# Altium PCB PCB1 final.PcbDoc
Units mm, origin at the board's own origin, x right, y up, seen from the top; angles counter-clockwise.
Board outline 178 x 121.6 mm, 2 copper layers (Top Layer, Bottom Layer); 18 components, 28 nets, 87 pads, 0 vias.
Unrouted connection lines stored in the file: 1.
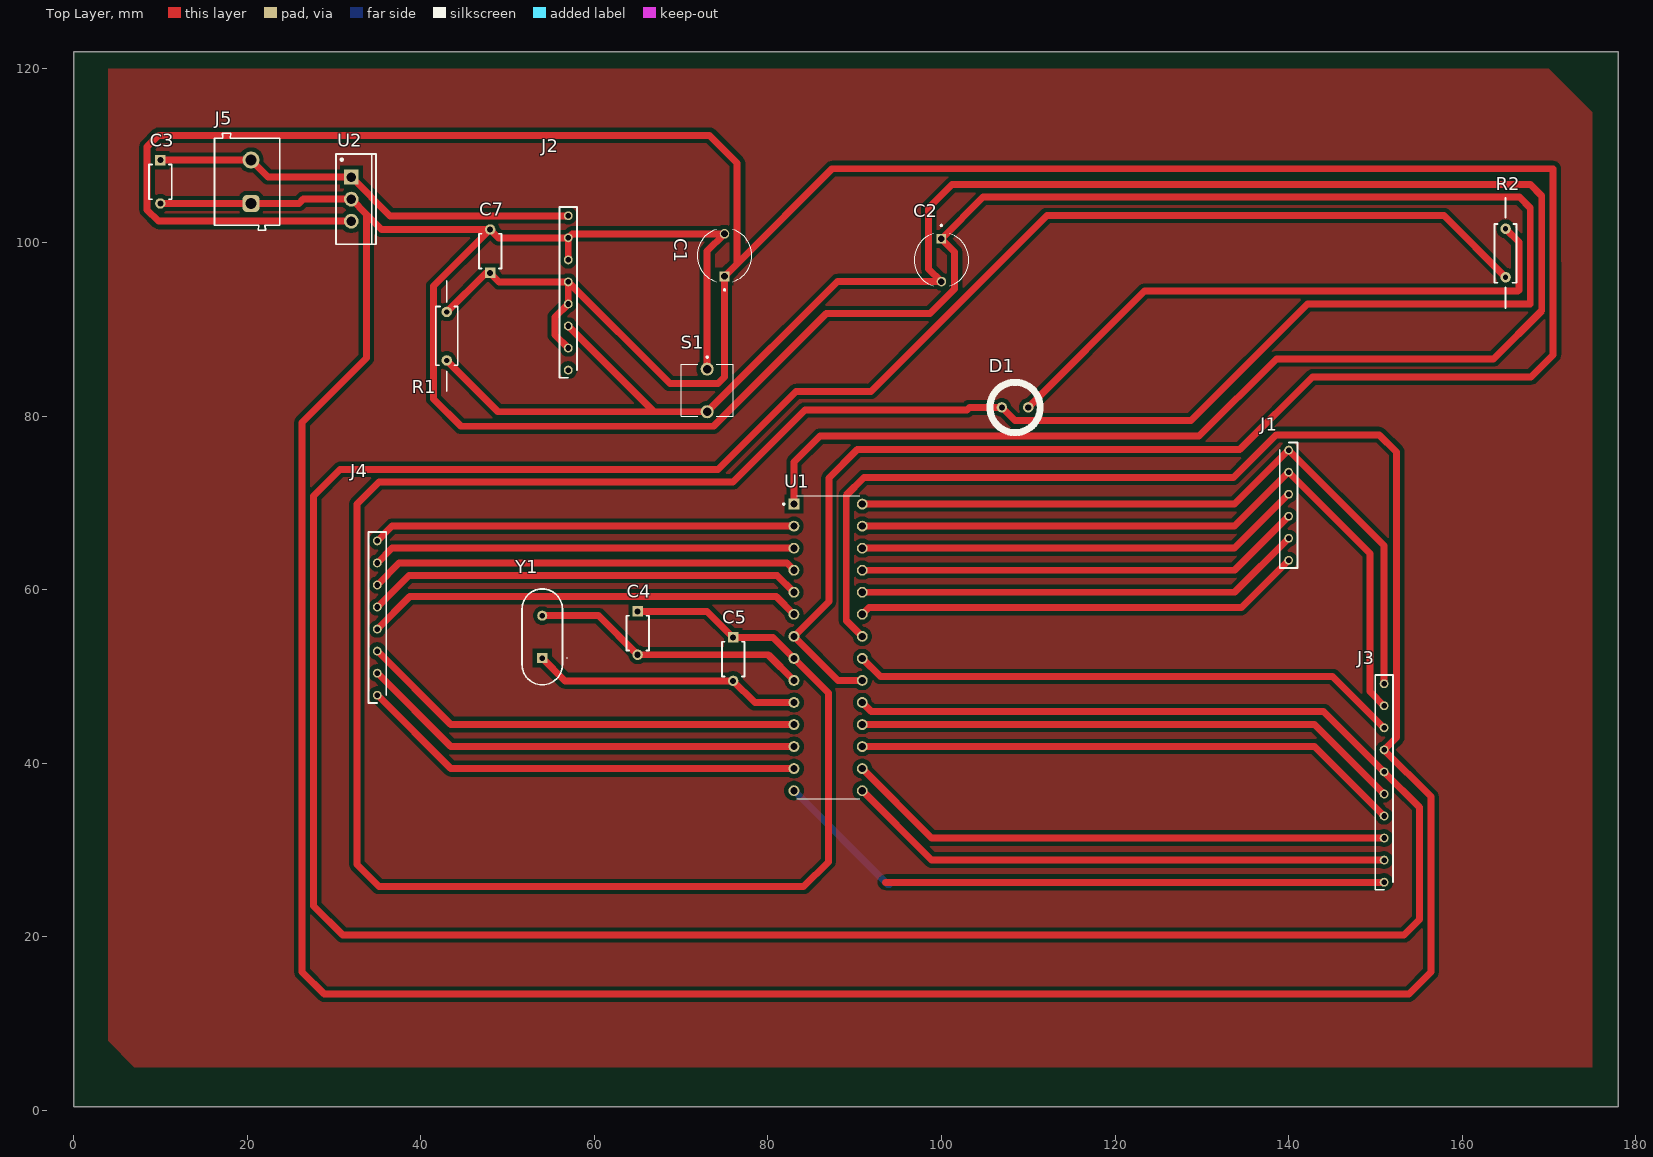
[diagram p0: Top Layer view]
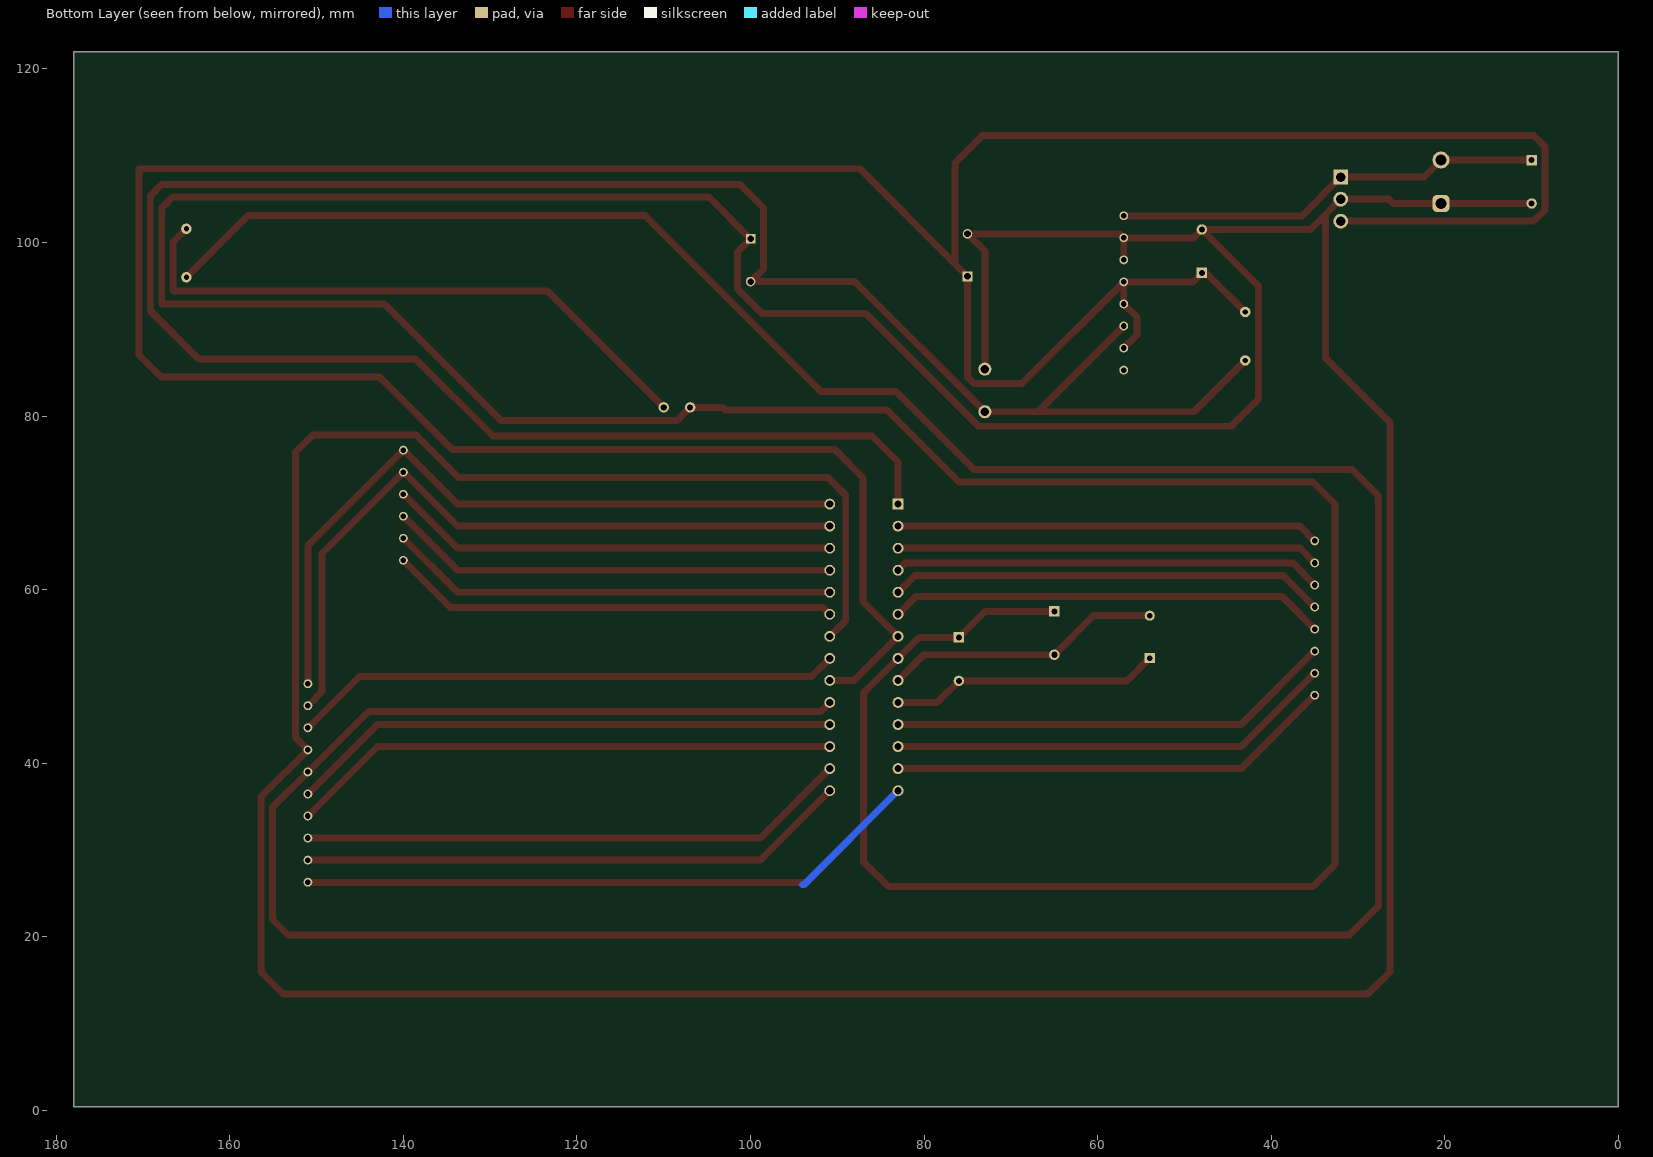
[diagram p1: Bottom Layer view, seen from below]

## Layer stack, top to bottom
Top Solder: solder mask 0.0102, Solder Resist, Dk 3.5
Top Layer: signal copper 0.0356
Dielectric 1: dielectric 0.32, FR-4, Dk 4.8
Bottom Layer: signal copper 0.0356
Bottom Solder: solder mask 0.0102, Solder Resist, Dk 3.5

## Board outline
0,0.4 178,0.4 178,122 0,122

## Design rules (kind name [scope] priority, off if disabled: settings)
Clearance Clearance_1 [All] p1: gap=0.5 ignorepadtopadclearanceinfootprint=FALSE
Clearance [All] p2: gap=0.5 ignorepadtopadclearanceinfootprint=TRUE
HoleSize [IsPad] p1: absolutevalues=TRUE maxlimit=2.54 minlimit=0.2 maxpercent=80.000 minpercent=20.000
HoleToHoleClearance [All] p1: gap=0.3 allowstackedmicrovias=TRUE
PolygonConnect [All] p1: connectstyle=Relief reliefconductorwidth=0.254 reliefentries=4 polygonreliefangle="90 Angle" airgapwidth=0.254
RoutingVias [All] p1: holewidth=0.711 width=1.27 viastyle="Through Hole" minholewidth=0.711 minwidth=1.27 maxholewidth=0.711 maxwidth=1.27
SolderMaskExpansion [All] p1: expansion=0.102 istentingtop=FALSE
SupplyNets "Schematic Supply Nets_1" [InNet('GND')] p1: voltage=0.000
SupplyNets "Schematic Supply Nets" [InNet('+5')] p2: voltage=0.000
Width [All] p1: maxlimit=0.8 minlimit=0.8 preferedwidth=0.8 minimp=50.000000 maximp=50.000000 favimp=50.000000
28 further rules are at their usual default settings.

## Components (designator, comment, footprint, x,y, rotation, side; value= is the part's Value field where it differs from the comment)
C1 "10uf" CAPPRD500W50D630H1120 75,98.5 r90 top
C2 "10uf" CAPPRD500W50D630H1120 100,98 r270 top
C3 "0.33uf" FP-K15H5-MFG 10,107 r270 top
C4 "12PF" FP-K15H5-MFG 65,55 r270 top
C5 "12PF" FP-K15H5-MFG 76,52 r270 top
C7 "0.1uf" FP-K15H5-MFG 48,99 r90 top
D1 "Light-Emitting Diode" LED 110.381,81 r180 top
J1 "pin_6" pin_6 140,76.08 r270 top
J2 "PIN_8" pin_8 57,85.3 r90 top
J3 "PIN_10" pin_10 151,26.3 r90 top
J4 "PIN_8" pin_8 35,47.84 r90 top
J5 "691102710002" 691102710002 20,107 r90 top
R1 "Resistor" RESISTANCE 43,82.094 r90 top value=10K
R2 "Resistor" RESISTANCE 165,105.906 r270 top value=1K
S1 "" SW_BUTT-2 73,83 r270 top
U1 "" DIP787W46P254L3467H508Q28 86.937,53.35 r0 top
U2 "L7805CV" TO220 32,105 r270 top
Y1 "16MHZ" XT9S20ANA16M 54,52.12 r90 top

## Footprints (in the part's own frame and the unit in brackets; to place one, negate y for a bottom-side part, rotate by r counter-clockwise, add the part's x,y. Pads: shape width x height; smd on the part's side, far side on the other; paste and mask are expansions set on the pad)
691102710002 [mm] "5,00mm - modular - blue - Horizontal entry with pressure clamp - 9,9 mm height - 02p"
  rrect50% 1.95x1.95 hole 1.3: 1(-2.5,-0.45)
  round 1.95 hole 1.3: 2(2.5,-0.45)
  silkscreen extent -5.6,-3.75 5.6,3.75, body extent -5.6,-3.75 5.6,3.75, height 9.96
CAPPRD500W50D630H1120 [mm]
  round 1.1 hole 0.75: N(2.5,0)
  rect 1.1x1.1 hole 0.75: P(-2.413,0)
  silkscreen extent -4.06,-3.15 3,3.15, body extent -3.15,-3.15 3.15,3.15, height 11.2
DIP787W46P254L3467H508Q28 [mm]
  rect 1.25x1.25 / inner round 1.25 / far side rect 1.25x1.25 hole 0.83: 1(-3.937,16.51)
  round 1.25 hole 0.83: 2(-3.937,13.97) 3(-3.937,11.43) 4(-3.937,8.89) 5(-3.937,6.35) 6(-3.937,3.81) 7(-3.937,1.27) 8(-3.937,-1.27) 9(-3.937,-3.81) 10(-3.937,-6.35) 11(-3.937,-8.89) 12(-3.937,-11.43) 13(-3.937,-13.97) 14(-3.937,-16.51) 15(3.937,-16.51) 16(3.937,-13.97) 17(3.937,-11.43) 18(3.937,-8.89) 19(3.937,-6.35) 20(3.937,-3.81) 21(3.937,-1.27) 22(3.937,1.27) 23(3.937,3.81) 24(3.937,6.35) 25(3.937,8.89) 26(3.937,11.43) 27(3.937,13.97) 28(3.937,16.51)
  silkscreen extent -5.2,-17.45 3.62,17.46, body extent -4.08,-17.97 3.82,16.7, height 4.57
FP-K15H5-MFG [mm]
  rect 1.2x1.2 hole 0.7 paste-2539.97 mask+0: 1(-2.5,0)
  round 1.2 hole 0.7 paste-2539.97 mask+0: 2(2.5,0)
  silkscreen extent -2,-1.3 2,1.3, body extent -3.2,-1.4 3.2,1.4, height 0.25
LED [mm]
  round 1.2 hole 0.7: 1(0.381,0) 2(3.429,0)
  silkscreen extent -1,-2.9 4.8,2.9
pin_6 [mm]
  round 1.02 / inner round 1.575 / far side round 1.02 hole 0.65: 1(0,0) 2(2.54,0) 3(5.08,0)
  round 1.02 hole 0.65: 4(7.62,0) 5(10.16,0) 6(12.7,0)
  silkscreen extent -0.89,-1.02 13.59,1.02
pin_8 [mm]
  round 1.02 / inner round 1.575 / far side round 1.02 hole 0.65: 1(0,0) 2(2.54,0) 3(5.08,0)
  round 1.02 hole 0.65: 4(7.62,0) 5(10.16,0) 6(12.7,0) 7(15.24,0) 8(17.78,0)
  silkscreen extent -0.89,-1.02 18.8,1.02
pin_10 [mm]
  round 1.02 / inner round 1.575 / far side round 1.02 hole 0.65: 1(0,0) 2(2.54,0) 3(5.08,0)
  round 1.02 hole 0.65: 4(7.62,0) 5(10.16,0) 6(12.7,0) 7(15.24,0) 8(17.78,0) 9(20.32,0) 10(22.86,0)
  silkscreen extent -0.89,-1.02 23.88,1.02
RESISTANCE [mm]
  round 1.2 hole 0.6: 1(4.318,0) 2(9.906,0)
  silkscreen extent 0.76,-1.27 13.46,1.27
SW_BUTT-2 [mm]
  round 1.508 hole 1: 1(-2.413,0) 2(2.5,0)
  silkscreen extent -3.9,-3 3,3
TO220 [mm] "TO, Thru-Hole, Vertical, Heatsink Mounted; 3 In-Line Leads; Pitch 2.54 mm"
  rect 1.7x1.7 hole 1.1: 1(-2.54,0)
  round 1.7 hole 1.1: 2(0,0) 3(2.54,0)
  silkscreen extent -5.2,-1.75 5.2,2.85, body extent -5.25,-1.8 5.25,2.9, height 19.7
XT9S20ANA16M [mm]
  rect 1.155x1.155 hole 0.63: 1(0,0)
  round 1.155 hole 0.63: 2(4.88,0)
  silkscreen extent -3.09,-2.9 7.96,2.33

## Part data
C1 C2: library part EEUFC2A100B, "Cap Aluminum Lytic 10uF 100V 20% Radial 105C Automotive Ammo", Package="RADIAL-2 Panasonic", Availability="In Stock", Check_prices=https://www.snapeda.com/parts/EEU-FC2A100B/Panasonic/view-part/2304901/?ref=eda, MF=Panasonic, MP=EEU-FC2A100B, Price=None, Purchase-URL=https://pricing.snapeda.com/search/part/EEU-FC2A100B/?ref=eda, SnapEDA_Link=https://www.snapeda.com/parts/EEU-FC2A100B/Panasonic/view-part/2304901/?ref=snap
C3 C4 C5 C7: library part CMP-02417-000078-1, "CAP CER 0.1UF 50V X7R RADIAL", Capacitance=100nF, Case/Package=Dipped, Dielectric=X7R, Dielectric Material=Ceramic, Max Operating Temperature=125°C, Min Operating Temperature=-55°C, Package Quantity=1, Tolerance=10%, Voltage=50V, Construction=RADIAL, Depth=2.5mm, Diameter=500um, Height=4mm, Height - Seated (Max)=0.257inch, Lead Diameter=0.5mm, Lead Free="Lead Free", Lead Length=30mm, Lead Pitch=5mm, Lead/Base Style="Formed Leads", Length=4mm, Mount="Through Hole", Packaging="Tape and Reel", Radiation Hardening=No, RoHS Compliant=Yes, Series=K, Termination=Radial, Thickness=2.6mm, Voltage Rating=50V, Voltage Rating (DC)=50V, Weight=0.005644oz, Width=2.5mm
D1: library part LED, AF=1, BV=0, BV_MAX=1e99, CJO=0, CJP=0, CTA=0, CTP=0, EG=1.11, FC=0.5, FCS=0.5, FV_MAX=1e99, IBV=0.001, IKF=0, IKR=0, IS=1e-14, ISR=1e-14, JSW=0, JTUN=0, JTUNSW=0, KEG=1, KF=0, LEVEL=1, MJSW=0.33, N=1, NBV=1, NR=1, NS=1, NTUN=30, PHP=1, RS=0, SimulationGenericComponent=True, TCV=0, TLEV=0, TLEVC=0, TM1=0, TM2=0, TNOM=27, TPB=0, TPHP=0, TRS=0, TRS2=0, TT=0, TTT1=0, TTT2=0, VJ=1, XTI=3, XTITUN=3
J3: library part 22-23-2101, "2.54mm,header,KK,vert,Sn,frictn lock,10w Molex KK 254 Series, Series Number 6373, 2.54mm Pitch 10 Way 1 Row Straight PCB Header, Solder Termination, 4A", Manufacturer_Name=Molex, Mouser Part Number=538-22-23-2101, Datasheet Link=http://www.molex.com/pdm_docs/sd/022232101_sd.pdf, Geometry.Height=11.05mm, Manufacturer_Part_Number=22-23-2101, Mouser Price/Stock=https://www.mouser.co.uk/ProductDetail/Molex/22-23-2101?qs=ekUqD6al18JrLI5%2F9qV%252BVA%3D%3D
J4: library part "PIN DIGITAL", "Headers & Wire Housings 2.54MM PITCH SRSW T/H HEADER 8 CKT", Manufacturer_Name=Molex, Manufacturer_Part_Number=87891-0808, Mouser Part Number=538-87891-0808, Datasheet Link=https://www.molex.com/pdm_docs/sd/878910808_sd.pdf, Geometry.Height=16.41mm, Mouser Price/Stock=https://www.mouser.co.uk/ProductDetail/Molex/87891-0808?qs=iLbezkQI%252Bsh%252BavKMBAJgwA%3D%3D
J5: library part CMP-1502-03258-2, Color=Blue, Current=15A, Max Operating Temperature=105°C, Min Operating Temperature=-40°C, Voltage=300V, Contact Material=Brass, Contact Plating=Tin, Current Rating=15A, Height=13.4mm, Housing Material=Nylon, Lead Pitch=5mm, Length=7.5mm, Mount="Through Hole", NexarPartId=8917706, Number of Contacts=2, Number of Levels=1, Number of Pins=2, Number of Positions Per Level=2, Packaging=Box, Pitch=5.0038mm, Plating=Steel, REACH SVHC=Unknown, RoHS=Compliant, Stripping length=-6mm, Termination=Screw, Voltage Rating=300V, Width=11.2mm, Wire Gauge (Max)=22AWG, Wire Gauge (Min)=14AWG, Wire/Cable Gauge=22AWG
S1: library part BUTT-2, "Tactile Switches MINI PUSH BUTTON SWITCH 2-PIN QTY. 4", Package=None, Availability="In Stock", Check_prices=https://www.snapeda.com/parts/BUTT-2/Gravitech/view-part/?ref=eda, MF=Gravitech, MP=BUTT-2, Price=None, Purchase-URL=https://pricing.snapeda.com/search/part/BUTT-2/?ref=eda, SnapEDA_Link=https://www.snapeda.com/parts/BUTT-2/Gravitech/view-part/?ref=snap
U1: library part atmega328p
U2: library part CMP-0244-00483-1, "Positive Voltage Regulator, 5V, 3-Pin TO-220", ComponentLink1Description="Manufacturer URL", ComponentLink1URL=http://www.st.com, ComponentLink2Description=Datasheet, ComponentLink2URL=http://www.st.com/internet/com/TECHNICAL_RESOURCES/TECHNICAL_LITERATURE/DATASHEET/CD00000444.pdf, ComponentLink3Description="Package Specification", ComponentLink3URL=http://www.st.com/internet/com/TECHNICAL_RESOURCES/TECHNICAL_LITERATURE/PACKAGE_INFORMATION/CD00004649.pdf, DatasheetVersion=16/11/2011, PackageDescription="TO, Thru-Hole, Vertical, Heatsink Mounted; 3 In-Line Leads; Pitch 2.54 mm", PackageReference=TO220, PackageVersion=ver3.0
Y1: library part XT9S20ANA16M, "Microprocessor, Crystal; 16 MHz; + 30 ppm _Typ._ @ 25 degC; 7 pF _Max._; 40 Ohm", Package=None, Availability=Unavailable, MF="Vishay Dale", MP=XT9S20ANA16M, Price=None, SnapEDA_Link=https://www.snapeda.com/parts/XT9S20ANA16M/Vishay%20Dale/view-part/231144/?ref=snap
R1 R2: SimulationGenericComponent=True, TC1=0, TC2=0

## Nets (pads, with @x,y where several pads share a name; then routed paths per layer and width w, separated by ;. In a path a pad name is that pad's centre, name@x,y a point inside that pad or via, vN(x,y) a via of type N, cw(c..) or ccw(c..) an arc to the next point about the centre after c; other vN are vias at no path point)
+5: C1.P C7.1 J2.2 J2.4 J2.5 R1.2 U1.7 U1.20 U2.3 | length 414
  Top Layer w0.8: U2.3 9.78,102.46 8.485,103.755 8.485,111.038 9.78,112.333 73.28,112.333 76.455,109.158 76.455,97.542 ; R1.2 47.5,96.5 C7.1 49.04,95.46 J2.5 ; J2.2 55.475,89.365 55.475,91.395 J2.4 J2.5 ; U1.20 88.08,49.54 U1.7 87.021,58.641 87.021,72.861 90.298,76.138 134.372,76.138 142.754,84.52 167.946,84.52 170.486,87.06 170.472,108.498 87.411,108.498 76.455,97.542 ; J2.5 68.702,83.758 74.238,83.758 75,84.52 C1.P 76.455,97.542
GND: C1.N C2.P C3.2 C4.1 C5.1 C7.2 D1.2 J2.6 J2.7 J3.7 J5.1 S1.1 U1.8 U1.22 U2.2 | length 923
  Top Layer w0.8: C3.2 15.216,104.5 ; 15.216,104.5 J5.1 25.96,104.5 26.46,105 U2.2 33.758,103.242 ; J2.6 J2.7 ; C4.1 73,57.5 C5.1 80.58,54.5 U1.8 86.971,48.109 86.971,28.64 84.126,25.795 35.18,25.795 32.64,28.335 32.64,69.89 35.18,72.43 75.998,72.43 84.278,80.71 102.922,80.71 103.212,81 D1.2 108.461,79.491 128.774,79.491 142.195,92.912 167.844,92.912 167.844,103.986 166.609,105.221 104.808,105.221 C2.P 101.525,98.888 101.525,94.659 98.68,91.815 86.724,91.815 73.74,78.83 44.629,78.83 41.479,81.98 41.479,94.979 C7.2 ; S1.1 73,99 C1.N 57.46,101 J2.7 ; U1.22 89.028,56.466 89.028,70.88 91.06,72.912 133.63,72.912 138.558,77.84 150.445,77.84 152.426,75.859 152.426,42.966 J3.7 156.389,36.151 156.389,15.94 153.849,13.4 28.881,13.4 26.341,15.94 26.341,79.262 33.758,86.679 33.758,103.242 ; 33.758,103.242 35.5,101.5 C7.2 ; C7.2 48.96,100.54 J2.7
NetC2_N: C2.N J2.3 R1.1 S1.2 U1.1 | length 272.5
  Top Layer w0.8: R1.1 48.912,80.5 66.88,80.5 ; J2.3 66.88,80.5 ; U1.1 83,74.707 85.98,77.687 129.668,77.687 138.583,86.603 163.628,86.603 169.165,92.14 169.165,105.373 167.87,106.669 101.22,106.669 98.528,103.976 98.528,96.972 C2.N 88,95.5 S1.2 66.88,80.5
NetC3_1: C3.1 J2.8 J5.2 U2.1 | length 49.7
  Top Layer w0.8: C3.1 J5.2 22.41,107.54 U2.1 36.46,103.08 J2.8
NetC4_2: C4.2 U1.9 Y1.2 | length 32.1
  Top Layer w0.8: Y1.2 60.5,57 C4.2 80.04,52.5 U1.9
NetC5_2: C5.2 U1.10 Y1.1 | length 31.1
  Top Layer w0.8: Y1.1 56.62,49.5 C5.2 78.5,47 U1.10
NetC6_1: J3.8 U1.21 | length 63.4
  Top Layer w0.8: U1.21 92.954,50 98,50 145.08,50 J3.8
NetD1_1: D1.1 R2.1 | length 69.8
  Top Layer w0.8: D1.1 123.401,94.401 166.422,94.401 166.523,94.502 166.523,100.065 R2.1
NetJ1_1: J1.1 J3.10 U1.28 | length 83.2
  Top Layer w0.8: U1.28 133.78,69.86 J1.1 151,65.08 J3.10
NetJ1_2: J1.2 J3.9 U1.27 | length 83.2
  Top Layer w0.8: U1.27 133.78,67.32 J1.2 149.378,64.162 149.378,48.242 J3.9
NetJ1_3: J1.3 U1.26 | length 51.7
  Top Layer w0.8: U1.26 133.78,64.78 J1.3
NetJ1_4: J1.4 U1.25 | length 51.7
  Top Layer w0.8: U1.25 133.78,62.24 J1.4
NetJ1_5: J1.5 U1.24 | length 51.7
  Top Layer w0.8: U1.24 133.78,59.7 J1.5
NetJ1_6: J1.6 U1.23 | length 51.7
  Top Layer w0.8: U1.23 91.64,57.926 134.546,57.926 J1.6
NetJ3_1: J3.1 U1.14 | length 73
  Top Layer w0.8: 93.562,26.278 151.004,26.278 151.004,26.3 J3.1
  Bottom Layer w0.8: U1.14 93.84,26 94,26
NetJ3_2: J3.2 U1.15 | length 63.4
  Top Layer w0.8: U1.15 98.874,28.84 J3.2
NetJ3_3: J3.3 U1.16 | length 63.4
  Top Layer w0.8: U1.16 98.874,31.38 J3.3
NetJ3_4: J3.4 U1.17 | length 63.4
  Top Layer w0.8: U1.17 143,41.92 J3.4
NetJ3_5: J3.5 U1.18 | length 63.4
  Top Layer w0.8: U1.18 143,44.46 J3.5
NetJ3_6: J3.6 R2.2 U1.19 | length 412.6
  Top Layer w0.8: U1.19 91.911,45.963 144.037,45.963 J3.6 155.068,34.932 155.068,21.985 153.29,20.207 31.014,20.207 27.662,23.56 27.662,70.815 30.71,73.863 74.257,73.863 83.237,82.844 91.873,82.844 112.142,103.113 157.887,103.113 R2.2
NetJ4_1: J4.1 U1.13 | length 51.5
  Top Layer w0.8: J4.1 43.46,39.38 U1.13
NetJ4_2: J4.2 U1.12 | length 51.5
  Top Layer w0.8: J4.2 43.46,41.92 U1.12
NetJ4_3: J4.3 U1.11 | length 51.5
  Top Layer w0.8: J4.3 43.46,44.46 U1.11
NetJ4_4: J4.4 U1.6 | length 50.4
  Top Layer w0.8: J4.4 38.736,59.196 80.964,59.196 U1.6
NetJ4_5: J4.5 U1.5 | length 50.3
  Top Layer w0.8: J4.5 38.625,61.625 81.075,61.625 U1.5
NetJ4_6: J4.6 U1.4 | length 49.4
  Top Layer w0.8: J4.6 37.517,63.057 82.183,63.057 U1.4
NetJ4_7: J4.7 U1.3 | length 48.7
  Top Layer w0.8: J4.7 36.7,64.78 U1.3
NetJ4_8: J4.8 U1.2 | length 48.7
  Top Layer w0.8: J4.8 36.7,67.32 U1.2
pads on no net: J2.1

## Polygon pours and split planes (outlines as drawn)
no net on Top Layer "NONET_L01_P001" (solid, pour order 1): 4,120 170,120 175,115 175,5 7,5 4,8